# Altium PCB PlacaPotenciaMPG2.PcbDoc
Units mm, origin at the board's own origin, x right, y up, seen from the top; angles counter-clockwise.
Board outline 200 x 120 mm, 2 copper layers (Top Layer, Bottom Layer), stack 1.671 mm thick; 62 components, 49 nets, 197 pads, 110 vias.
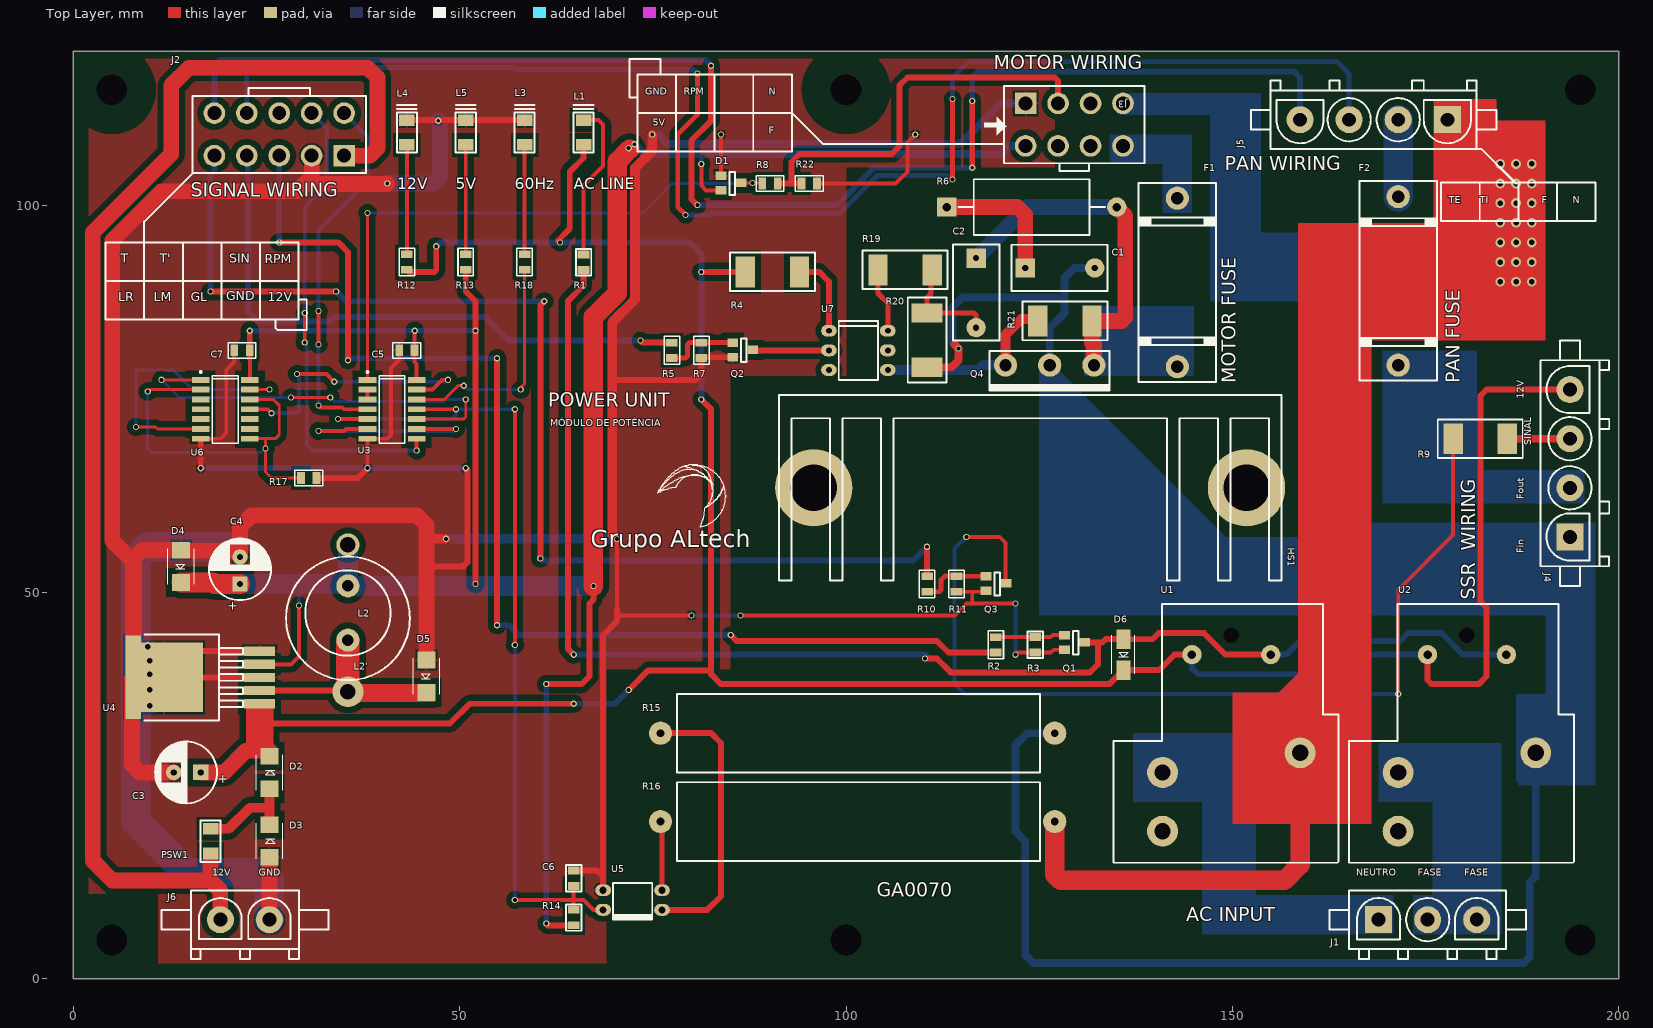
[diagram p0: Top Layer view]
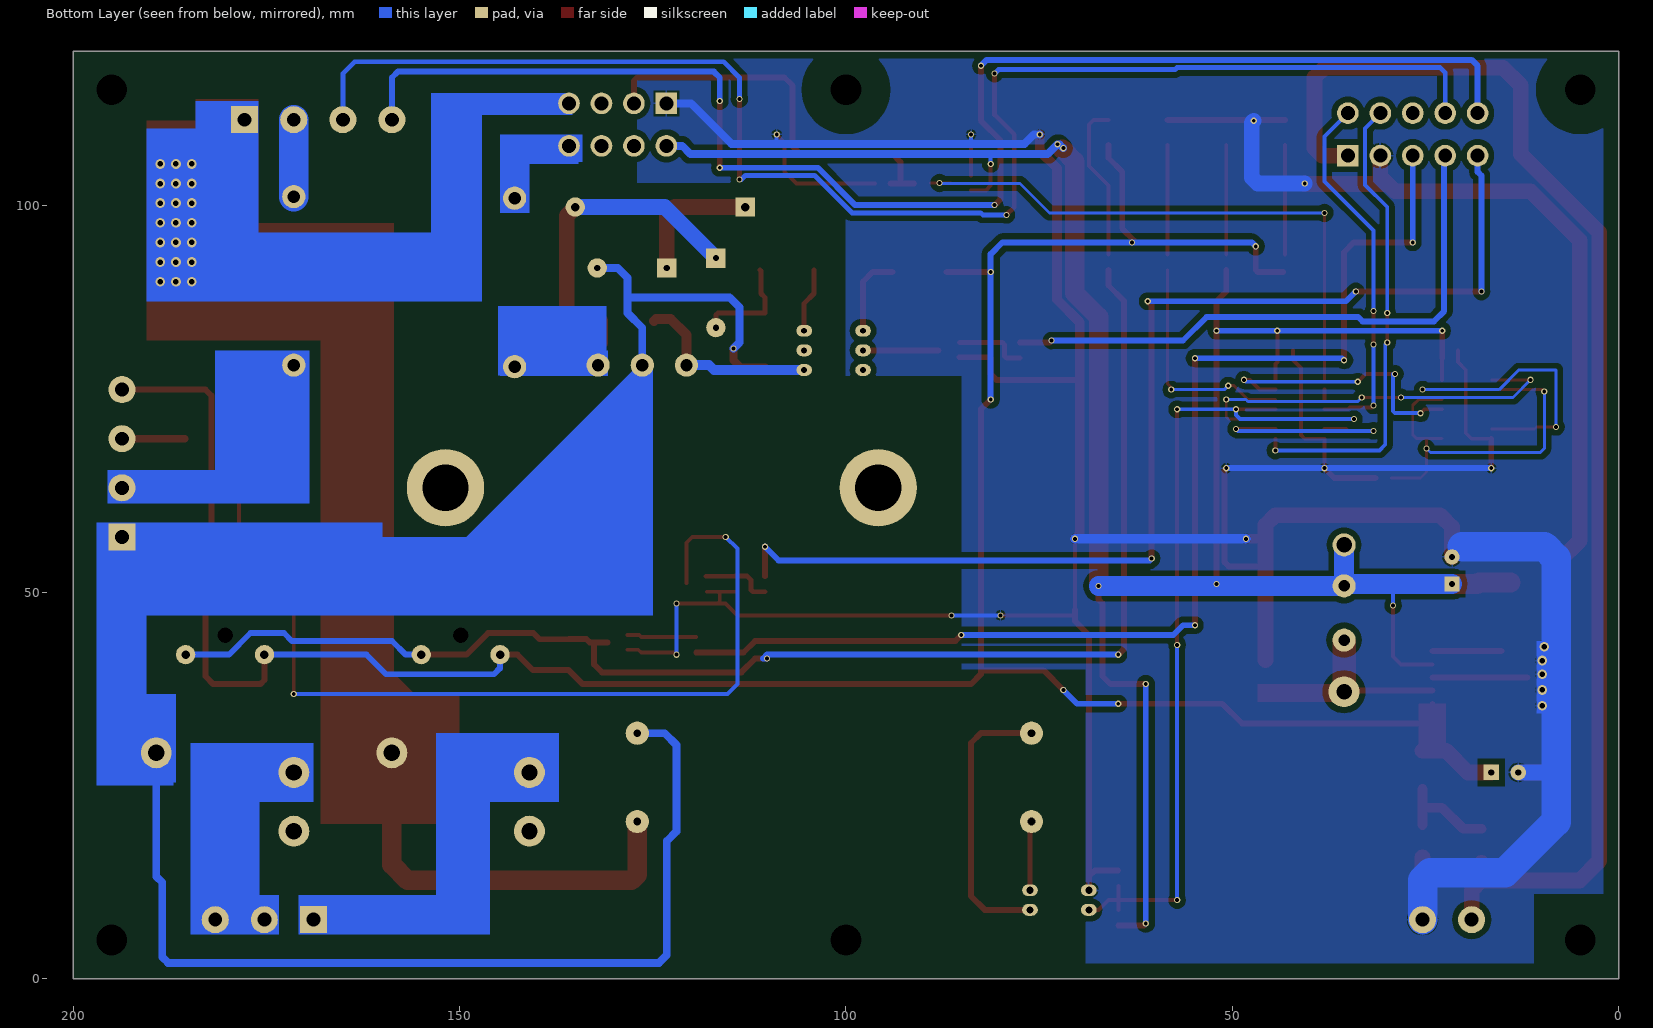
[diagram p1: Bottom Layer view, seen from below]
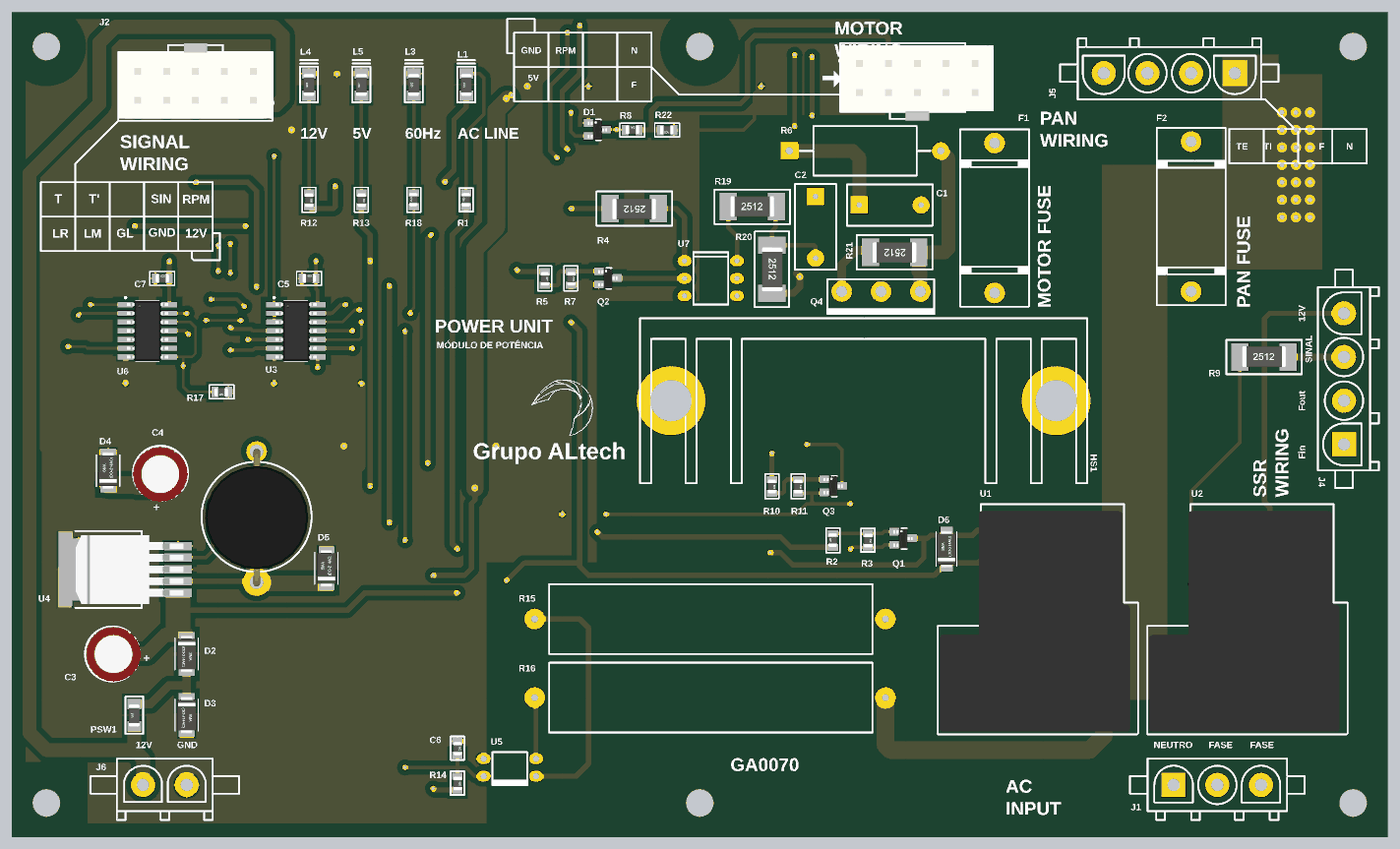
[diagram p2: 3D render of the assembled board from above, using the file's embedded part models]

## Layer stack, top to bottom
Top Solder: solder mask 0.0102, Solder Resist, Dk 3.5
Top Layer: signal copper 0.0356
Dielectric 1: dielectric 1.6, FR-4, Dk 4.8
Bottom Layer: signal copper 0.0356
Bottom Solder: solder mask 0.0102, Solder Resist, Dk 3.5

## Board outline
0,0 200,0 200,120 0,120

## Design rules (kind name [scope] priority, off if disabled: settings)
Clearance Clearance_1 [InPolygon] p1: gap=0.762
Clearance [All] p2: gap=0.305
HoleSize [All] p1: absolutevalues=TRUE maxlimit=10 minlimit=0.025 maxpercent=80.000 minpercent=20.000
PolygonConnect [All] p1: connectstyle=Relief reliefconductorwidth=0.254 reliefentries=4 polygonreliefangle="90 Angle" airgapwidth=0.254
RoutingVias [All] p1: holewidth=0.5 width=0.8 viastyle="Through Hole" minholewidth=0.5 minwidth=0.8 maxholewidth=0.5 maxwidth=0.8
SolderMaskExpansion [All] p1: expansion=0.102
UnpouredPolygon [All] p1: allowunpoured=FALSE
Width [All] p1: maxlimit=20.32 minlimit=0.254 preferedwidth=0.508
28 further rules are at their usual default settings.

## Classes and differential pairs
component class Sincronismo: C5 C6 C7 L3 R14 R15 R16 R17 R18 U5 U6
component class Regulador: C3 C4 D2 D3 D4 D5 J6 L2 L2' L4 L5 PSW1 R12 R13 U4
component class Potencia: C1 C2 D1 F1 F2 HS1 J2 J3 J4 J5 Q2 Q3 Q4 R4 R5 R6 R7 R8 R9 R10 R11 R19 R20 R21 R22 U3 U7
component class Conectores: D6 J1 L1 Q1 R1 R2 R3 U1 U2

## Components (designator, comment, footprint, x,y, rotation, side; value= is the part's Value field where it differs from the comment)
C1 "10nF/400V" "cap 330nF/250V" 123.19,91.948 r0 top
C2 "33nF/400V" "cap 330nF/250V" 116.84,93.218 r270 top
C3 "220uF/35V" "CAP POL 8x12mm" 16.51,26.67 r180 top
C4 "470uF/35V" "CAP POL 8x12mm" 21.59,51.054 r90 top
C5 "100nF/50V-0805" "0805-REVISADO ONDA"#1 43.18,81.28 r0 top
C6 "NM" "0805-REVISADO ONDA"#2 64.77,13.97 r270 top
C7 "100nF/50V-0805" "0805-REVISADO ONDA"#1 21.844,81.28 r0 top
D1 "BAT54ST" "SOT23 - REVISADO ONDA" 83.82,103.886 r270 top
D2 "1N4007-SMA" DO-214AA 25.4,26.67 r90 top
D3 "SMBJ15CA" DO-214AA 25.4,17.78 r90 top
D4 "SMBJ5.0CA" DO-214AA 13.97,53.34 r270 top
D5 "MBRS360T" DO-214AA 45.72,39.116 r270 top
D6 "1N4007" "SMA DIODES" 135.89,41.91 r270 top
F1 "ZH242" ZH242_REVISADO 142.875,100.965 r270 top
F2 "ZH242" ZH242_REVISADO 171.45,79.375 r90 top
HS1 "HS 40mm TO-220PÉ" "DISSIPADOR GRANDE" 123.825,63.5 r0 top
J1 "HYLOCK FÊMEA 3 VIAS PARA PCB" "CONECTOR HYLOCK 3 VIAS" 168.91,7.62 r0 top
J2 "MFPL-10" MFPC-10 26.67,109.22 r180 top
J3 "MFPL-08" MFPC-08 129.54,110.49 r180 top
J4 "HYLOCK 4 VIAS PCB" "CONECTOR HYLOK 4 VIAS" 193.675,57.15 r90 top
J5 "HYLOCK 4 VIAS PCB" "CONECTOR HYLOK 4 VIAS" 177.8,111.125 r180 top
J6 "HYLOCK 2 VIAS FÊMEA P/ PCB" "CONECTOR HYLOCK 2 VIAS" 19.05,7.62 r0 top
L1 "LED VERMELHO 0603 SMD" "LED 1206" 66.04,107.95 r90 top
L2 "330uH(IMAG 10x10 fio 26AWG)" "INDUTOR 47mH" 35.56,50.8 r270 top
L2' "330uH(IMAG 10x10 fio 26AWG)" "INDUTOR LOCO" 35.56,54.61 r270 top
L3 "LED VERMELHO 0603 SMD" "LED 1206" 58.42,107.95 r90 top
L4 "LED VERMELHO 0603 SMD" "LED 1206" 43.18,107.95 r90 top
L5 "LED VERMELHO 0603 SMD" "LED 1206" 50.8,107.95 r90 top
PSW1 "POLYSWITCH 1206, 1A TRIP - 0,5A HOLD" "1206-REVISADO ONDA" 17.78,17.78 r90 top
Q1 "BC846L" "SOT23 - REVISADO ONDA" 128.27,44.45 r270 top
Q2 "BC846" "SOT23 - REVISADO ONDA" 85.344,82.296 r270 top
Q3 "BC846L" "SOT23 - REVISADO ONDA" 118.11,52.07 r270 top
Q4 "BTA41-600BRG" "TO-247 - duplicate" 132.08,79.375 r180 top
R1 "22K-0805-5%" "0805-REVISADO ONDA"#2 66.04,91.694 r90 top
R2 "1K-0805-5%" "0805-REVISADO ONDA"#1 119.38,43.18 r90 top
R3 "10K-0805-5%" "0805-REVISADO ONDA"#2 124.46,44.196 r270 top
R4 "220R-2512-5%" "2512 - REVISADO ONDA" 93.98,91.44 r180 top
R5 "1K-0805-5%" "0805-REVISADO ONDA"#1 77.47,81.28 r270 top
R6 "390R-5W-5%" "RESISTOR 5W FIO" 113.03,99.822 r0 top
R7 "10K-0805-5%" "0805-REVISADO ONDA"#1 81.28,81.28 r270 top
R8 "1K-0805-5%" "0805-REVISADO ONDA"#1 90.17,102.87 r0 top
R9 "100R-2512-5%" "2512 - REVISADO ONDA" 178.562,69.85 r0 top
R10 "1K-0805-5%" "0805-REVISADO ONDA"#1 110.49,51.054 r270 top
R11 "10K-0805-5%" "0805-REVISADO ONDA"#1 114.3,51.054 r270 top
R12 "22K-0805-5%" "0805-REVISADO ONDA"#1 43.18,92.71 r270 top
R13 "22K-0805-5%" "0805-REVISADO ONDA"#1 50.8,92.71 r270 top
R14 "5K6-0805-5%" "0805-REVISADO ONDA"#2 64.77,8.89 r270 top
R15 "22K-10W-5%" "RESISTOR 10W CERAMICO" 127,31.75 r180 top
R16 "22K-10W-5%" "RESISTOR 10W CERAMICO" 127,20.32 r180 top
R17 "10K-0805-5%" "0805-REVISADO ONDA"#1 30.48,64.77 r180 top
R18 "1K-0805-5%" "0805-REVISADO ONDA"#1 58.42,92.71 r90 top
R19 "100R-2512-5%" "2512 - REVISADO ONDA" 104.14,91.694 r0 top
R20 "100R-2512-5%" "2512 - REVISADO ONDA" 110.49,86.106 r270 top
R21 "100R-2512-5%" "2512 - REVISADO ONDA" 131.826,85.09 r180 top
R22 "100K-0805-5%" "0805-REVISADO ONDA"#1 95.25,102.87 r180 top
U1 "RELÉ SLA CROMATEK" "RELE SLA CROMATEK" 149.86,44.45 r180 top
U2 "RELÉ SLA CROMATEK" "RELE SLA CROMATEK" 180.34,44.45 r180 top
U3 "74HC14D,653" "SOIC 14 PINOS" 38.1,77.47 r0 top
U4 "LM2575S-5.0" TO-263-5 24.13,35.56 r90 top
U5 "TLP620" DIP-4 76.2,8.89 r180 top
U6 "74HC393D,653" "SOIC 14 PINOS" 16.51,77.47 r0 top
U7 "MOC3020" dip6 97.79,83.82 r0 top

## Footprints (in the part's own frame and the unit in brackets; to place one, negate y for a bottom-side part, rotate by r counter-clockwise, add the part's x,y. Pads: shape width x height; smd on the part's side, far side on the other; paste and mask are expansions set on the pad)
"0805-REVISADO ONDA"#1 [mm]
  rect 1x1.5 smd: 1(-1,0) 2(1,0)
  silkscreen extent -1.8,-1 1.8,1, body extent -0.96,-0.58 1.04,0.67, height 0.78
"0805-REVISADO ONDA"#2 [mm]
  rect 1x1.5 smd: 1(0,0) 2(2,0)
  silkscreen extent -0.7,-1 2.7,1, body extent 0.04,-0.58 2.04,0.67, height 0.78
"1206-REVISADO ONDA" [mm]
  rect 1.5x2 smd: 1(-1.6,0) 2(1.6,0)
  silkscreen extent -2.7,-1.3 2.7,1.3, body extent -1.65,-0.81 1.55,0.79, height 1
"2512 - REVISADO ONDA" [mm]
  rect 2.5x4 smd: 1(0,0) 2(7,0)
  silkscreen extent -2,-2.5 9,2.5, body extent 0.33,-1.45 6.68,1.55, height 1.6
"cap 330nF/250V" [mm]
  rect 2.5x2.5 hole 0.8: 1(0,0)
  round 2.5 hole 0.8: 2(9,0)
  silkscreen extent -1.78,-3 10.67,3
"CAP POL 8x12mm" [mm]
  rect 2x2 hole 0.8: 1(0,0)
  round 2 hole 0.8: 2(3.5,0)
  silkscreen extent -2.1,-4 5.9,4, body extent -2.25,-3.97 5.75,4.03, height 12
"CONECTOR HYLOCK 2 VIAS" [mm]
  round 3.5 hole 1.8: 1(0,0) 2(6.35,0)
  silkscreen extent -7.62,-5.08 13.97,3.8
"CONECTOR HYLOCK 3 VIAS" [mm]
  rect 3.5x3.5 hole 1.8: 1(0,0)
  round 3.5 hole 1.8: 2(6.35,0) 3(12.7,0)
  silkscreen extent -6.35,-5.08 19.05,3.8
"CONECTOR HYLOK 4 VIAS" [mm]
  rect 3.5x3.5 hole 1.8: 1(0,0)
  round 3.5 hole 1.8: 2(6.35,0) 3(12.7,0) 4(19.05,0)
  silkscreen extent -6.35,-5.08 25.4,3.8
dip6 [mil] "dip6"
  oval 80x60 hole 30: 1(0,0) 2(0,-100) 3(0,-200) 4(300,-200) 5(300,-100) 6(300,0)
  silkscreen extent 50,-250 250,50
DIP-4 [mil] "DIP-4"
  oval 80x60 hole 36: 1(0,0) 2(0,-100) 3(300,-100) 4(300,0)
  silkscreen extent 50,-138 250,50
"DISSIPADOR GRANDE" [mm]
  round 10 hole 6: ""(-28,0) ""(28,0)
  silkscreen extent -32.5,-12 32.5,12
DO-214AA [mm] "SMBJ LITTELFUSE"
  rect 2.15x2.3 smd: 1(-2.1,0) 2(2.1,0)
  silkscreen extent -2.3,-1.7 2.3,1.7, body extent -2.75,-1.4 2.75,1.4, height 2.6
"INDUTOR 47mH" [mm]
  round 3 hole 1.5: 1(0,0) 2(7,0)
  silkscreen extent -2.02,-5.52 9.02,5.52
"INDUTOR LOCO" [mm]
  round 3 hole 2: 1(-1.5,0)
  round 4 hole 2: 2(17.5,0)
  silkscreen extent 0,-8 16,8, body extent -1.88,-7.47 18.12,7.53, height 13.1
"LED 1206" [mm]
  rect 1.5x2 smd: 1(-0.076,0) 2(3.124,0)
  silkscreen extent -1.08,-1.3 5.08,1.3, body extent -0.13,-0.81 3.07,0.79, height 1
MFPC-08 [mm]
  rect 2.8x2.8 hole 1.8: 1(6.3,-2.75)
  round 2.8 hole 1.8: 2(2.1,-2.75) 3(-2.1,-2.75) 4(-6.3,-2.75) 5(6.3,2.75) 6(2.1,2.75) 7(-2.1,2.75) 8(-6.3,2.75)
  silkscreen extent -9.1,-5 9.1,6, body extent -13.19,-4.72 9.41,6.28, height 12.8
MFPC-10 [mm]
  rect 2.8x2.8 hole 1.8: 1(-8.4,2.75)
  round 2.8 hole 1.8: 2(-4.2,2.75) 3(0,2.75) 4(4.2,2.75) 5(8.4,2.75) 6(-8.4,-2.75) 7(-4.2,-2.75) 8(0,-2.75) 9(4.2,-2.75) 10(8.4,-2.75)
  silkscreen extent -11.2,-6 11.2,5, body extent -11.51,-6.28 11.09,4.72, height 12.8
"RELE SLA CROMATEK" [mm]
  round 2.5 hole 1.1: 1(-5.1,2.54) 2(5.1,2.54)
  round 4 hole 2.1: 3(-8.9,15.24) 4(8.9,25.38) 5(8.9,17.78)
  round 0 hole 2: ""(0,0)
  silkscreen extent -13.86,-4 15.24,29.46, body extent -12.7,-3.02 15,29.08, height 20.1
"RESISTOR 5W FIO" [mm] "RESISTOR 5W FIO"
  rect 2.5x2.5 hole 1.1: 1(0,0)
  round 2.5 hole 1.1: 2(22,0)
  silkscreen extent 1.5,-3.6 20.5,3.6
"RESISTOR 10W CERAMICO" [mm]
  round 3 hole 1: 1(0,0) 2(51,0)
  silkscreen extent 1.9,-5.08 48.89,5.08
"SMA DIODES" [mm] "PACKAGE SMA COM DIMENSÕES DO DATASHEET DA DIODES"
  rect 2.5x1.8 smd: 1(-2,0) 2(2,0)
  silkscreen extent -2.5,-1.5 2.5,1.5, body extent -2.75,-1.4 2.75,1.4, height 2.6
"SOIC 14 PINOS" [mil] "SOIC, 14-Leads, Body 8,8x4,0mm (max), Pitch 1,27mm, IPC Medium Density"
  rect 90x30 smd: 1(0,0) 2(0,-50) 3(0,-100) 4(0,-150) 5(0,-200) 6(0,-250) 7(0,-300) 8(250,-300) 9(250,-250) 10(250,-200) 11(250,-150) 12(250,-100) 13(250,-50) 14(250,0)
  silkscreen extent -5,-323 190,45, body extent 8,-323 244,23, height 67
"SOT23 - REVISADO ONDA" [mm]
  rect 1.1x1.4 smd: 1(0,0) 2(1.9,0) 3(0.95,2.6)
  silkscreen extent -0.5,1.1 2.5,1.8, body extent -0.45,-0.1 2.45,2.7, height 1.3
"TO-247 - duplicate" [mm] "CASE 340D-01"
  round 3 hole 1.6: 1(0,0) 2(5.72,0) 3(11.44,0)
  silkscreen extent -2.02,-1.81 13.51,3.28
TO-263-5 [mm]
  rect 1.2x4 smd: 1(0,0) 2(1.7,0) 3(3.4,0) 4(5.1,0) 5(6.8,0)
  rect 9x10 smd: ""(3.4,12.328)
  rect 10.8x2 smd: ""(3.4,16.37)
  silkscreen extent -2.19,2.17 8.99,14.92, body extent -1.6,-0.79 8.4,14.88, height 4.78
ZH242_REVISADO [mm] "PORTA FUSÍVEL ZH242 REVISADO EM 2015"
  round 3 hole 1.6: 1(0,0) 2(21.8,0)
  silkscreen extent -2,-5 23.8,5

## Part data
C1 C2 C6: library part 100nF/50-0805-NPO, "100nF/50-0805-NPO"
C3: library part 2200uF/50V, "2200uF/50V"
C4: library part 470uF/50V, "470uF/50V"
C5 C7: library part 100nF/50-0805-NPO
D2: library part 1N4007, "1N4007"
D3: library part SMBJ30.0A, "SMBJ30.0A"
D4: library part SMBJ5.0A, "SMBJ5.0A"
D5: library part 1N5819-SOD80, "1N5819-SOD80"
F1 F2: library part "PORTA FUSÍVEL TIPO BERÇO", "PORTA FUSÍVEL TIPO BERÇO"
HS1: library part "DISSIPADOR 40mm PÉ"
J1: library part PCMC2-3, "PCMC2-3"
J4 J5: library part PCMC2-4, "PCMC2-4"
J6: library part PCMC2-2, "PCMC2-2"
L2 L2': library part "indutor 1mH CNF15", "1mH-CNF15-26 AWG"
PSW1: library part "POLYSWITCH 200mA", "NANOSMDC020F-2"
Q1 Q3: library part BC846
Q2: "BC846L"
R2 R5: library part 10K-0805-5%, "10K-0805-5%"
R6: library part 47R-5W-5%, "47R-5W-5%"
R9: library part 100R-0805-5%, "100R-0805-5%"
R14 R15 R16: library part 22K-0805-5%, "22K-0805-5%"
R19 R20 R21: library part 220R-2512-5%, "220R-2512-5%"
U3: library part 74HC14D, "74HC14D"
U4: library part LM2596S-ADJ, "LM2596S-ADJ"
U5: library part PC814, "PC814"
U6: library part 74HC393

## Free pads (board coordinates)
  round 0 hole 4: ""(5,5) ""(5,115) ""(100,5) ""(100,115) ""(195,5) ""(195,115)

## Via types
v1: diameter 0.8, hole 0.5, Top Layer to Bottom Layer, 84 vias
v2: diameter 1.27, hole 0.711, Top Layer to Bottom Layer, 26 vias

## Nets (pads, with @x,y where several pads share a name; then routed paths per layer and width w, separated by ;. In a path a pad name is that pad's centre, name@x,y a point inside that pad or via, vN(x,y) a via of type N, cw(c..) or ccw(c..) an arc to the next point about the centre after c; other vN are vias at no path point)
5V: C4.1 C5.2 C7.2 D1.2 D4.2 J3.5 L2'.1 L2.1 R13.2 R14.2 U3.14 U4.4 U6.14 | length 326.8
  Top Layer w0.508: U6.14 22.86,80.264 ; U4.4 28.214,40.66 29.21,41.656 v1(29.21,48.26) ; v1(44.196,83.82) 44.18,83.804 C5.2 44.18,79.772 44.45,79.502 U3.14 ; v1(81.28,105.41) 81.28,102.616 81.91,101.986 D1.2
  Top Layer w0.762: 22.86,80.264 v1(22.86,83.82) ; R13.2 50.8,88.9 52.07,87.63 v1(52.07,83.82) v1(52.07,51.054) ; v1(61.214,7.112) 61.436,6.89 R14.2 ; v1(61.214,38.1) 65.786,38.1 66.802,39.116 66.802,48.514 67.31,49.022 v1(67.31,50.8)
  Top Layer w2.54: D4.2 18.102,51.24 18.288,51.054 C4.1 ; v1(67.31,50.8) 67.31,85.598 70.409,88.697 70.409,105.715 v1@72.009,107.315
  Bottom Layer w0.508: v1(29.21,48.26) 29.21,50.8 ; v1(81.28,105.41) 81.28,106.426
  Bottom Layer w0.762: v1(22.86,83.82) v1(44.196,83.82) v1(52.07,83.82) ; v1(61.214,7.112) v1(61.214,38.1)
  Bottom Layer w1.016: v1(71.882,107.442) 72.39,107.95 v1(72.644,107.95) 73.914,106.68 120.142,106.68 121.202,107.74 J3.5
  Bottom Layer w2.54: C4.1 35.306,51.054 L2.1 ; L2'.1 L2.1 ; v1(67.31,50.8) L2.1
11V: C3.1 D2.2 D6.2 J4.4 L1.1 R4.2 R12.2 U1.2 U2.2 U4.1 | length 351.7
  Top Layer w0.762: U4.1 24.13,32.258 25.4,30.988 D2.2@25.4,29.464 ; 24.892,33.02 48.768,33.02 51.308,35.56 v1(64.77,35.56) ; R12.2@43.45,91.44 46.736,91.44 46.99,91.694 v1(46.99,94.742) ; v1(62.992,95.25) 62.738,95.504 64.262,97.028 64.262,104.394 66.04,106.172 L1.1 ; v1(71.882,37.338) 74.422,39.878 82.55,39.878 ; v1(81.28,74.93) 82.55,73.66 82.55,39.878 ; v1(81.28,91.44) R4.2 ; U1.2 142.494,41.91 140.494,39.91 D6.2 134.08,38.1 83.82,38.1 82.55,39.37 82.55,39.878 ; U2.2 175.24,38.628 175.768,38.1 181.864,38.1 182.88,39.116 182.88,48.006 182.118,48.768 182.118,75.438 182.88,76.2 J4.4
  Top Layer w2.032: C3.1 19.558,26.67 22.352,29.464 D2.2@25.4,29.464
  Bottom Layer w0.762: v1(46.99,94.742) 47.498,95.25 v1(62.992,95.25) 79.756,95.25 81.28,93.726 v1(81.28,91.44) v1(81.28,74.93) ; v1(64.77,35.56) 70.104,35.56 v1(71.882,37.338) ; U1.2 144.78,41.89 144.78,40.132 145.542,39.37 159.512,39.37 162.052,41.91 U2.2
12V: J2.1 J6.1 PSW1.1 | length 170.7
  Top Layer w2.032: 17.78,14.986 17.78,12.7 ; J6.1 19.05,11.43 17.78,12.7 ; J2.1 38.398,106.47 39.37,107.442 39.37,116.586 38.1,117.856 14.986,117.856 12.7,115.57 12.7,106.68 2.54,96.52 2.54,15.24 5.08,12.7 17.78,12.7
ENERGIZA_LINHA: J2.3 R2.1 | length 154.5
  Top Layer w0.762: v1(26.67,95.25) 34.29,95.25 35.56,93.98 v1(35.56,80.01) ; v1(54.864,45.72) v1(54.864,80.264) ; v1(85.09,44.45) 85.852,43.688 111.76,43.688 113.268,42.18 R2.1
  Bottom Layer w0.762: v1(26.67,95.25) J2.3 ; v1(35.56,80.01) 35.814,80.264 v1(54.864,80.264) ; v1(54.864,45.72) 56.388,45.72 57.658,44.45 v1(85.09,44.45)
ENTRADA_FASE: C1.2 J4.1 Q4.2 R15.1 R20.2 U2.3 | length 228.4
  Top Layer w1.016: R20.2 113.65,79.106 114.554,80.01 v1(114.554,81.534) 114.046,82.042
  Bottom Layer w1.016: v1(114.554,81.534) 113.792,82.296 113.792,86.868 115.062,88.138 128.27,88.138 ; Q4.2 126.36,84.196 128.27,86.106 128.27,88.138 ; R15.1 123.444,31.75 121.92,30.226 121.92,19.05 123.19,17.78 123.19,3.048 124.206,2.032 187.706,2.032 188.468,2.794 188.468,12.446 189.24,13.218 U2.3 ; C1.2 129.54,91.948 128.27,90.678 128.27,88.138
  Bottom Layer w2.54: 126.36,74.3 Q4.2 ; 167.005,53.975 192.405,53.975
  Bottom Layer w5.08: U2.3 189.24,31.125 193.675,35.56 193.675,55.245
ENTRADA_NEUTRO: J3.4 J5.1 R16.1 U1.3 | length 237.1
  Top Layer w2.54: R16.1 127,13.462 127.762,12.7 156.718,12.7 158.75,14.732 U1.3@158.75,29.2
  Top Layer w5.08: U1.3 165.1,35.55 165.1,74.93 163.195,76.835 163.195,88.265 165.735,90.805 179.705,90.805 180.975,92.075 180.975,110.49 180.34,111.125
  Bottom Layer w2.54: J3.4 149.015,113.24 151.765,110.49 151.765,96.52 154.305,93.98 180.34,93.98 181.61,95.25 181.61,110.49 180.975,111.125 J5.1
  other v2: 184.658,90.17 186.69,90.17 188.722,90.17 184.658,92.71 186.69,92.71 188.722,92.71 184.658,95.25 186.69,95.25 188.722,95.25 184.658,97.79 186.69,97.79 188.722,97.79 184.658,100.33 186.69,100.33 188.722,100.33 184.658,102.87 186.69,102.87 188.722,102.87 184.658,105.41 186.69,105.41 188.722,105.41
GATE_MOTOR: J2.4 R5.1 | length 77.2
  Top Layer w0.762: v1(73.406,82.55) 73.676,82.28 R5.1
  Bottom Layer w0.762: J2.4 22.606,106.334 22.606,86.36 23.946,85.02 33.153,85.02 33.731,85.598 53.34,85.598 56.388,82.55 v1(73.406,82.55)
GATE_RESISTENCIA: J2.5 R10.1 | length 149.7
  Top Layer w0.762: v1(17.78,88.9) v1(34.036,88.9) ; v1(60.452,54.356) 60.452,87.122 v1(60.96,87.63) ; R10.1 v1(110.49,55.88)
  Bottom Layer w0.762: v1(17.78,88.9) 17.78,103.886 18.27,104.376 J2.5 ; v1(34.036,88.9) 35.306,87.63 v1(60.96,87.63) ; v1(60.452,54.356) 60.706,54.102 108.712,54.102 v1(110.49,55.88)
GND: C3.2 C4.2 C5.1 C6.1 C7.1 D1.1 D3.1 D4.1 D5.1 J2.2 J3.1 J6.2 L3.2 L4.2 L5.2 Q1.2 Q2.2 Q3.2 R3.2 R7.2 R11.2 R17.1 R22.1 U3.7 U4. U4.3 U4.5 U5.3 U6.7 | length 720.9
  Top Layer w0.508: U6.7 19.05,69.85 19.812,70.612 19.812,78.74 20.828,79.756 20.828,81.264 C7.1 ; v1(38.1,66.04) U3.7 40.64,69.85 41.148,70.358 41.148,78.994 42.164,80.01 42.164,81.264 C5.1 ; 70.358,47.244 70.612,46.99 v1(80.01,46.99) ; 70.358,47.752 v1(70.358,56.896) ; D1.1 v1(83.82,109.22) ; v1(86.36,46.99) 114.046,46.99 115.57,48.514 116.586,48.514 ; R22.1 106.426,102.87 107.95,104.394 107.95,108.204 v1(108.966,109.22) ; R11.2 116.586,50.054 ; Q3.2@117.994,50.054 116.586,50.054 ; v1(121.92,41.91) 122.206,42.196 R3.2 124.492,42.164 126.492,42.164 126.878,42.55 Q1.2 ; v1(121.92,48.514) 116.586,48.514 ; 116.586,48.514 116.332,48.768 116.332,49.8 116.586,50.054
  Top Layer w0.762: U4.@11.802,38.96 U4.3 ; U4.@15.202,42.36 U4.5 ; v1(16.51,66.04) U6.7 ; R17.1 36.83,64.77 v1(38.1,66.04) ; L4.2 L5.2 L3.2 ; 45.72,53.34 50.495,53.34 51.003,53.848 51.003,65.837 v1(50.8,66.04) ; C6.1 67.818,13.97 68.58,13.208 ; U5.3 68.58,13.208 ; 69.762,77.47 80.518,77.47 81.28,78.232 R7.2 ; 70.358,47.752 70.358,47.244 70.358,46.228 68.58,44.45 68.58,13.208 ; R7.2@81.396,80.396 Q2.2
  Top Layer w1.27: 45.974,56.896 v1(48.26,56.896) ; v1(70.358,56.896) 69.762,57.492 69.762,77.47 69.762,84.924 72.683,87.845 72.683,104.863 74.93,107.111 v1(74.93,109.22)
  Top Layer w2.032: C3.2 8.636,26.67 7.62,27.686 7.62,38.82 U4.@7.76,38.96 ; J6.2 D3.1 ; J2.2 30.87,103.768 29.913,102.811 ; v1(40.64,102.87) 40.581,102.811 29.913,102.811 ; D5.1 45.72,53.34 45.72,58.674 44.45,59.944 23.114,59.944 21.59,58.42 C4.2 20.772,55.372 14.038,55.372 D4.1 8.958,55.44 7.874,54.356 7.874,39.074 U4.@7.76,38.96 ; U4.@7.76,38.96 7.76,53.962 5.08,56.642 5.08,95.504 11.43,101.854 28.956,101.854 29.913,102.811
  Bottom Layer w0.508: v1(80.01,46.99) v1(86.36,46.99) ; 83.82,108.001 v1(83.82,109.22) ; 108.966,108.001 v1(108.966,109.22) ; v1(121.92,41.91) v1(121.92,48.514)
  Bottom Layer w0.762: v1(16.51,66.04) v1(38.1,66.04) v1(50.8,66.04)
  Bottom Layer w1.016: v1(74.93,109.22) 75.692,109.22 76.911,108.001 83.82,108.001 108.966,108.001 114.808,108.001 120.047,113.24 J3.1
  Bottom Layer w1.27: v1(48.26,56.896) v1(70.358,56.896)
  Bottom Layer w2.032: 8.382,26.67 C3.2 ; v1(40.64,102.87) 46.736,102.87 47.498,103.632 47.498,110.744 v1(47.244,110.998)
  Bottom Layer w3.81: 20.264,55.88 9.652,55.88 8.128,54.356 8.128,20.32 14.732,13.716 24.384,13.716 25.4,12.7 J6.2
  other v2: 9.906,35.306 9.906,37.338 9.906,39.37 9.906,41.148 9.652,42.926
NetC1_1: C1.1 R6.1 | length 17.4
  Top Layer w2.032: R6.1 122.174,99.822 123.19,98.806 C1.1
NetC2_1: C2.1 F1.2 Q4.1 R6.2 R21.1 | length 56.5
  Top Layer w2.032: Q4.1 132.08,82.042 131.826,82.296 R21.1 135.636,85.09 136.144,85.598 136.144,98.708 R6.2
  Bottom Layer w2.032: C2.1 123.444,99.822 R6.2 ; Q4.1 F1.2@142.665,79.375
NetC2_2: C2.2 R19.2 R20.1 | length 13.9
  Top Layer w0.635: R19.2 110.998,91.552 110.998,88.646 110.49,88.138 R20.1 116.586,86.106 116.84,85.852 C2.2
NetC6_2: C6.2 R14.1 U3.5 U3.11 U5.4 | length 111.3
  Top Layer w0.508: v1(34.29,72.39) U3.5 ; U3.11 v1(49.53,73.66) ; v1(57.15,10.16) 64.77,10.16 ; v1(57.15,43.18) v1(57.15,73.66) ; R14.1 64.77,10.16 ; C6.2 64.77,10.16 ; U5.4 67.31,8.89 66.04,10.16 64.77,10.16
  Bottom Layer w0.508: v1(34.29,72.39) 49.022,72.39 49.53,72.898 v1(49.53,73.66) v1(57.15,73.66) ; v1(57.15,10.16) v1(57.15,43.18)
NetD1_3: D1.3 R8.1 U3.1 | length 75.7
  Top Layer w0.381: U3.1 v1(38.1,99.06) ; D1.3 v1(87.884,102.936) R8.1@89.104,102.936
  Bottom Layer w0.381: v1(38.1,99.06) 73.66,99.06 77.47,102.87 87.884,102.87 v1(87.884,102.936)
NetD2_1: D2.1 D3.2 PSW1.2 | length 13.4
  Top Layer w1.27: PSW1.2 20.142,19.38 22.86,22.098 25.4,22.098 ; D3.2 25.4,22.098 ; D2.1 25.4,22.098
NetD5_2: D5.2 L2'.2 L2.2 U4.2 | length 28.4
  Top Layer w0.762: U4.2 34.114,37.26 34.29,37.084 35.534,37.084 L2'.2 L2.2
  Top Layer w1.524: L2'.2@35.534,37.084 37.338,37.084 37.406,37.016 D5.2
NetD6_1: D6.1 Q1.3 R1.1 U1.1 U2.1 | length 182.3
  Top Layer w0.762: v1(64.77,41.91) 64.008,42.672 64.008,87.63 66.04,89.662 R1.1 ; v1(110.236,41.402) 111.76,41.402 113.538,39.624 131.572,39.624 132.588,40.64 132.588,43.246 ; Q1.3 133.162,43.5 133.604,43.942 135.858,43.942 D6.1 139.668,43.91 140.462,44.704 146.304,44.704 149.098,41.91 U1.1
  Bottom Layer w0.762: v1(64.77,41.91) 110.236,41.91 110.744,41.402 v1(110.236,41.402) ; U1.1 156.972,41.91 158.75,43.688 171.704,43.688 172.72,44.704 177.038,44.704 179.832,41.91 U2.1
NetF1_1: F1.1 J3.8 | length 12.8
  Bottom Layer w2.54: J3.8 141.18,107.74 142.875,106.045 F1.1
NetF2_1: F2.1 J4.2 | length 37
  Bottom Layer w3.81: F2.1 171.45,65.405 173.355,63.5 J4.2
NetF2_2: F2.2 J5.2 | length 10
  Bottom Layer w3.81: F2.2 J5.2
NetJ1_1: J1.1 U1.5 | length 43.7
  Bottom Layer w3.81: U1.5 146.685,26.67 149.225,24.13 149.225,10.795 152.4,7.62 J1.1
NetJ1_2: J1.2 J1.3 U2.5 | length 33
  Bottom Layer w2.54: J1.2 J1.3
  Bottom Layer w3.81: U2.5 177.165,26.67 181.61,22.225 J1.3
NetJ3_2: J3.2 R8.2 R22.2 | length 52.6
  Top Layer w0.762: R8.2 92.964,102.87 ; R22.2 92.964,102.87 ; J3.2 127.44,116.146 127,116.586 107.95,116.586 106.934,115.57 106.934,107.696 105.918,106.68 93.98,106.68 92.964,105.664 92.964,102.87
NetJ4_3: J4.3 R9.2 | length 8.1
  Top Layer w1.016: R9.2 J4.3
NetL1_2: L1.2 R1.2 | length 20.6
  Top Layer w0.508: R1.2 66.04,102.616 68.58,105.156 68.58,110.49 67.996,111.074 L1.2
NetL3_1: L3.1 R18.2 | length 14.2
  Top Layer w0.508: R18.2 L3.1
NetL4_1: L4.1 R12.1 | length 14.2
  Top Layer w0.508: R12.1 L4.1
NetL5_1: L5.1 R13.1 | length 14.2
  Top Layer w0.508: R13.1 L5.1
NetQ1_1: Q1.1 R2.2 R3.1 | length 9
  Top Layer w0.508: R2.2 126.476,44.18 126.746,44.45 Q1.1
NetQ2_1: Q2.1 R5.2 R7.1 | length 9.6
  Top Layer w0.635: R5.2 79.264,80.28 79.502,80.518 79.502,82.042 79.756,82.296 81.264,82.296 R7.1 ; R7.1@81.296,82.296 Q2.1
NetQ2_3: Q2.3 U7.2 | length 9.8
  Top Layer w0.762: Q2.3@88.01,81.28 U7.2
NetQ3_1: Q3.1 R10.2 R11.1 | length 9.2
  Top Layer w0.635: R10.2 112.03,50.054 112.268,50.292 112.268,51.562 112.776,52.07 114.284,52.07 R11.1 Q3.1@118.094,52.054
NetQ3_3: Q3.3 R9.1 | length 124.2
  Top Layer w0.508: v1(115.57,57.15) 119.888,57.15 120.65,56.388 Q3.3@120.65,51.18 ; v1(171.45,36.83) 171.45,50.292 178.562,57.404 R9.1
  Bottom Layer w0.508: v1(115.57,57.15) 114.046,55.626 114.046,38.1 115.316,36.83 v1(171.45,36.83)
NetQ4_3: Q4.3 R21.2 U7.4 | length 24.6
  Top Layer w1.27: Q4.3 120.64,83.302 122.682,85.344 124.572,85.344 R21.2
  Bottom Layer w1.27: U7.4 117.094,78.74 117.729,79.375 Q4.3
NetR4_1: R4.1 U7.1 | length 10.7
  Top Layer w0.762: R4.1 96.52,91.44 97.79,90.17 U7.1
NetR15_2: R15.2 U5.1 | length 36.5
  Top Layer w0.762: R15.2 82.55,31.75 83.82,30.48 83.82,10.668 82.042,8.89 U5.1
NetR16_2: R16.2 U5.2 | length 8.7
  Top Layer w0.635: U5.2 R16.2@76.2,20.12
NetR17_2: R17.2 U6.2 U6.8 U6.12 | length 51.2
  Top Layer w0.381: v1(9.652,75.946) 9.906,76.2 U6.2 ; U6.8 24.892,69.85 ; U6.12 25.908,74.93 26.67,74.168 26.67,70.358 26.162,69.85 24.892,69.85 ; R17.2 25.654,64.77 24.892,65.532 v1(24.892,68.58) 24.892,69.85
  Bottom Layer w0.381: v1(9.652,75.946) 9.652,68.58 10.16,68.072 24.384,68.072 v1(24.892,68.58)
NetR18_1: R18.1 U3.12 | length 30.5
  Top Layer w0.381: U3.12 48.006,74.93 49.784,76.708 v1(50.546,76.708) ; v1(57.912,76.2) 57.658,76.2 58.42,76.962 R18.1
  Bottom Layer w0.381: v1(50.546,76.708) 51.054,76.2 v1(57.912,76.2)
NetR19_1: R19.1 U7.6 | length 8.4
  Top Layer w0.635: R19.1 104.14,88.646 105.41,87.376 U7.6
NetU3_2: U3.2 U3.3 | length 1.3
  Top Layer w0.508: U3.3 U3.2
NetU3_6: U3.6 U3.9 | length 29.4
  Top Layer w0.508: v1(31.75,70.866) 35.052,70.866 35.306,71.12 U3.6 ; U3.9 v1(49.53,71.12)
  Bottom Layer w0.508: v1(31.75,70.866) 49.276,70.866 v1(49.53,71.12)
NetU3_10: U3.10 U6.1 | length 54.5
  Top Layer w0.381: v1(11.43,77.47) U6.1 ; v1(28.194,75.184) v1(33.274,75.184) ; U3.10 50.546,72.39 50.8,72.644 v1(50.8,74.93)
  Bottom Layer w0.381: v1(11.43,77.47) 13.716,75.184 v1(28.194,75.184) ; v1(33.274,75.184) 33.782,74.676 48.006,74.676 48.26,74.93 v1(50.8,74.93)
NetU3_13: U3.13 U6.11 | length 36.4
  Top Layer w0.508: U6.11 25.146,73.66 v1(25.654,73.152) ; v1(28.956,78.232) 32.766,78.232 v1(33.782,77.216) ; U3.13 46.482,76.2 47.752,77.47 v1(48.514,77.47)
  Bottom Layer w0.508: v1(25.654,73.152) 28.956,73.152 29.21,73.406 29.21,78.232 v1(28.956,78.232) ; v1(33.782,77.216) 48.26,77.216 v1(48.514,77.47)
NetU6_6: U6.6 U6.13 | length 36.7
  Top Layer w0.381: v1(8.128,71.374) 10.668,71.374 10.922,71.12 U6.6 ; U6.13 v1(25.4,76.2)
  Bottom Layer w0.381: v1(8.128,71.374) 8.128,78.74 12.954,78.74 15.494,76.2 v1(25.4,76.2)
RPM: J2.6 U3.4 | length 48.2
  Top Layer w0.508: v1(31.75,74.168) 32.004,73.914 34.798,73.914 35.052,73.66 U3.4 ; v1(31.75,82.042) v1(31.75,86.36)
  Bottom Layer w0.508: v1(31.75,74.168) v1(31.75,82.042) ; v1(31.75,86.36) 31.75,96.774 38.1,103.124 38.1,108.94 J2.6
SINCRONISMO: J2.7 U3.8 | length 61
  Top Layer w0.508: v1(29.972,82.296) v1(29.972,86.106) ; v1(44.45,68.326) U3.8
  Bottom Layer w0.508: v1(29.972,82.296) 30.226,82.042 30.226,69.088 30.988,68.326 v1(44.45,68.326) ; v1(29.972,86.106) 29.972,99.822 32.829,102.679 32.829,110.011 J2.7
TEMP: J2.9 J5.3 | length 192.7
  Top Layer w0.635: v1(79.248,98.806) 78.232,99.822 78.232,109.22 80.772,111.76 v1(80.772,117.094) ; v1(113.792,103.378) v1(113.792,113.792)
  Bottom Layer w0.635: J2.9 22.47,117.212 23.114,117.856 57.15,117.856 57.404,117.602 80.264,117.602 v1(80.772,117.094) ; v1(79.248,98.806) 82.296,98.806 82.563,99.073 99.222,99.073 104.048,103.899 113.017,103.899 113.538,103.378 v1(113.792,103.378) ; v1(113.792,113.792) 113.792,116.586 115.824,118.618 163.576,118.618 165.1,117.094 J5.3
TEMP': J2.10 J5.4 | length 188.2
  Top Layer w0.762: v1(80.772,100.076) 80.01,100.838 80.01,108.458 82.55,110.998 v1(82.55,118.11) ; v1(116.332,104.902) v1(116.332,113.538)
  Bottom Layer w0.762: J2.10 18.27,118.092 19.05,118.872 81.788,118.872 v1(82.55,118.11) ; v1(80.772,100.076) 98.806,100.076 103.632,104.902 v1(116.332,104.902) ; v1(116.332,113.538) 116.332,116.586 117.094,117.348 157.988,117.348 158.75,116.586 J5.4
pads on no net: HS1. J2.8 J3.3 J3.6 J3.7 U1. U1.4 U2. U2.4 U6.3 U6.4 U6.5 U6.9 U6.10 U7.3 U7.5

## Polygon pours and split planes (outlines as drawn)
GND on Top Layer "Bottom Layer-No Net" (solid, pour order 4): 2,11 10,11 11,11 11,2 69,2 69,14 69,40 85,40 85,78 100,78 100,105 127,105 127,118 126,119 3,119 2,119
GND on Bottom Layer "Bottom Layer-No Net" (solid, pour order 6): 2,11 11,11 11,2 69,2 69,40 85,40 85,78 100,78 100,103 127,103 127,119 88,119 2,119

## Other copper
Top Layer:
  rectangle net ENTRADA_NEUTRO: 163.93,26 168,89
  rectangle net ENTRADA_NEUTRO: 150,20 168,26
  rectangle net ENTRADA_NEUTRO: 150,20 159,37
  rectangle net ENTRADA_NEUTRO: 154.94,25.4 167.64,36.83
  rectangle net ENTRADA_NEUTRO: 161.29,25.4 167.64,93.98
  rectangle net ENTRADA_NEUTRO: 161.29,86.614 185.42,93.98
  rectangle net ENTRADA_NEUTRO: 178.562,86.614 185.42,108.712
  rectangle net ENTRADA_NEUTRO: 176.022,108.458 184.15,113.792
  rectangle net ENTRADA_NEUTRO: 158.496,35.56 161.29,93.98
  rectangle net ENTRADA_NEUTRO: 165.354,82.55 185.42,86.614
  rectangle net ENTRADA_NEUTRO: 158.496,93.98 179.324,97.79
  rectangle net ENTRADA_NEUTRO: 176.022,93.218 182.372,108.712
  rectangle net ENTRADA_NEUTRO: 184.15,82.55 190.5,110.998
  rectangle net 11V: 22.352,28.702 25.908,35.56
  rectangle net NetD5_2: 34.036,35.814 37.084,43.942
  rectangle net NetD5_2: 37.084,35.814 46.736,38.1
  region net ENTRADA_NEUTRO: 159,40 155,36 155,35 161,35
Bottom Layer:
  rectangle net ENTRADA_FASE: 160,55 187,59
  rectangle net ENTRADA_FASE: 187,25 191,27
  rectangle net ENTRADA_FASE: 191,25 197,53
  rectangle net ENTRADA_FASE: 187,53 197,59
  rectangle net NetJ1_1: 138.43,23.495 152.4,29.21
  rectangle net NetJ1_1: 137.16,23.495 152.4,31.75
  rectangle net NetJ1_1: 137.16,22.86 153.035,31.75
  rectangle net NetJ1_1: 146.05,5.715 153.035,22.86
  rectangle net NetJ1_1: 146.05,5.715 170.815,10.795
  rectangle net NetJ1_2: 168.91,24.13 184.785,30.48
  rectangle net NetJ1_2: 179.705,5.715 184.785,27.305
  rectangle net NetJ1_2: 173.355,5.715 179.705,10.795
  rectangle net NetJ1_2: 175.895,9.525 182.245,25.4
  rectangle net NetJ1_2: 168.91,22.86 177.165,24.13
  rectangle net ENTRADA_FASE: 190.5,25.4 196.85,57.785
  rectangle net ENTRADA_FASE: 186.69,25.4 196.85,35.56
  rectangle net ENTRADA_FASE: 186.69,35.56 191.135,36.83
  rectangle net ENTRADA_FASE: 125.73,46.99 191.135,57.15
  rectangle net ENTRADA_FASE: 124.968,46.99 127.508,79.502
  rectangle net NetF2_1: 169.418,61.468 195.58,65.786
  rectangle net NetF2_1: 169.418,65.786 173.482,81.28
  rectangle net ENTRADA_NEUTRO: 176.022,108.458 184.15,113.538
  rectangle net ENTRADA_NEUTRO: 178.816,87.63 184.15,108.458
  rectangle net ENTRADA_NEUTRO: 147.066,87.63 178.816,96.52
  rectangle net ENTRADA_NEUTRO: 147.066,96.52 153.67,114.554
  rectangle net ENTRADA_NEUTRO: 135.382,111.76 153.67,114.554
  rectangle net NetF1_1: 134.62,105.41 144.78,109.22
  rectangle net NetF1_1: 140.97,99.06 144.78,105.41
  rectangle net NetF1_1: 134.112,105.664 135.636,109.22
  rectangle net NetC2_1: 130.81,77.978 144.78,81.28
  rectangle net NetF2_1: 173.482,64.262 181.61,81.28
  rectangle net ENTRADA_NEUTRO: 176.022,87.63 190.5,109.982
  rectangle net GND: 8.636,34.29 10.668,43.688
  rectangle net NetC2_1: 131,78 145,87
  region net ENTRADA_FASE: 127.508,78.74 149.606,56.642 126.492,56.642

## Silkscreen, mask and mechanical layers (free items; w line width, h text height)
Top Overlay:
  drawing of 542 lines, arcs and shapes, not listed
  text "MOTOR WIRING" at 119.126,117.094 h3.05
  text "GND" at 74,114 h1.52
  text "RPM" at 79,114 h1.52
  text "N" at 90,114 h1.52
  text "5V" at 75,110 h1.52
  text "F" at 90,109 h1.52
  text "PAN WIRING" at 149,104 h3.05
  text "12V" at 41.91,101.6 h2.54
  text "5V" at 49.53,101.6 h2.54
  text "60Hz" at 57.15,101.6 h2.54
  text "AC LINE" at 64.77,101.6 h2.54
  text "SIGNAL WIRING" at 15.24,100.584 h3.05
  text "TE" at 178,100 h1.52
  text "TI" at 182,100 h1.52
  text "F" at 190,100 h1.52
  text "N" at 194,100 h1.52
  text "T" at 6.191,92.25 h2.03
  text "T'" at 11.191,92.25 h2.03
  text "SIN" at 20.191,92.25 h2.03
  text "RPM" at 24.768,92.187 h2.03
  text "GND" at 19.815,87.361 h2.03
  text "GL" at 15.191,87.25 h2.03
  text "12V" at 25.191,87.25 h2.03
  text "LR" at 5.845,87.234 h2.03
  text "LM" at 10.417,87.234 h2.03
  text "MOTOR FUSE" at 151,77 h3.05 r90
  text "PAN FUSE" at 180,77 h3.05 r90
  text "12V" at 188,75 h1.52 r90
  text "POWER UNIT" at 61.468,73.406 h3.05
  text "MÓDULO DE POTÊNCIA" at 61.722,71.12 h1.52
  text "SINAL" at 189,69 h1.52 r90
  text "Fout" at 188,62 h1.52 r90
  text "Grupo ALtech" at 67,55 h3.81
  text "Fin" at 188,55 h1.52 r90
  text "SSR  WIRING" at 182,49 h3.05 r90
  text "12V" at 18,13 h1.52
  text "GND" at 24,13 h1.52
  text "NEUTRO" at 166,13 h1.52
  text "FASE" at 174,13 h1.52
  text "FASE" at 180,13 h1.52
  text "GA0070" at 104,10 h3.05
  text "AC INPUT" at 144.018,6.858 h3.05
Mechanical 1:
  lines w0.254: 198,125 200,125 200,120 ; 199,125 0,125 0,120 ; 0,0 0,-5 200,-5 200,0 ; 0,0 0,120 ; 0,0 200,0 ; 0,120 200,120 ; 200,0 200,120
  text "BORDA PARA FIXAÇÃO AO PALLET DE MONTAGEM" at 67,122 h3
  text "BORDA PARA FIXAÇÃO AO PALLET DE MONTAGEM" at 63,-3 h3
  text "- PRODUZIR EM 2 Oz/Ft²" at 1.651,-13.081 h4
  text "- Mascara de solda a cor vermelha" at 1.651,-18.542 h4
Drill Drawing:
  circle w0.085: c214.365,64.588 r0.635
  lines w0.085: 213.73,68.08 214.048,68.08 214.365,67.763 214.683,68.08 215,68.08 214.683,68.398 215,68.715 214.683,68.715 214.365,69.033 214.048,68.715 213.73,68.715 214.048,68.398 213.73,68.08 ; 213.73,71.573 215,71.573 215,72.843 213.73,72.843 213.73,71.573 ; 213.73,75.7 214.048,75.7 214.365,75.383 214.683,75.7 215,75.7 214.683,76.018 215,76.335 214.683,76.335 214.365,76.653 214.048,76.335 213.73,76.335 214.048,76.018 213.73,75.7 ; 213.73,80.463 215,80.463 214.365,79.193 213.73,80.463 ; 213.73,91.258 214.365,90.623 215,91.258 214.365,91.893 213.73,91.258 ; 213.73,95.703 215,95.703 214.365,94.433 213.73,95.703 ; 213.73,98.243 214.365,98.56 215,98.243 214.683,98.878 215,99.513 214.365,99.195 213.73,99.513 214.048,98.878 213.73,98.243 ; 213.73,102.053 213.73,102.37 214.048,102.688 213.73,103.005 213.73,103.323 214.048,103.323 214.365,103.005 214.683,103.323 215,103.323 215,103.005 214.683,102.688 215,102.37 215,102.053 214.683,102.053 214.365,102.37 214.048,102.053 213.73,102.053 ; 213.73,106.18 214.048,106.18 214.048,105.863 214.683,105.863 214.683,106.18 215,106.18 215,106.815 214.683,106.815 214.683,107.133 214.048,107.133 214.048,106.815 213.73,106.815 213.73,106.18 ; 213.73,113.483 214.365,113.8 215,113.483 214.683,114.118 215,114.753 214.365,114.435 213.73,114.753 214.048,114.118 213.73,113.483 ; 213.984,68.207 214.175,68.207 214.365,68.017 214.556,68.207 214.746,68.207 214.556,68.398 214.746,68.588 214.556,68.588 214.365,68.779 214.175,68.588 213.984,68.588 214.175,68.398 213.984,68.207 ; 213.984,80.209 214.746,80.209 214.365,79.447 213.984,80.209 ; 213.984,98.497 214.365,98.687 214.746,98.497 214.556,98.878 214.746,99.259 214.365,99.068 213.984,99.259 214.175,98.878 213.984,98.497
  lines w0.381: 212,62.81 310.526,62.81 ; 212,116.15 310.526,116.15 ; 225.992,59 225.992,119.96 ; 243.717,59 243.717,119.96 ; 277.895,59 277.895,119.96 ; 290.744,59 290.744,119.96 ; 212,59 310.526,59 310.526,119.96 212,119.96 212,59
  text "Symbol" at 214.286,117.293 h1.83
  text "Hit Count" at 227.135,117.293 h1.83
  text "Finished Hole Size" at 244.86,117.293 h1.83
  text "Plated" at 279.038,117.293 h1.83
  text "Hole Type" at 291.887,117.293 h1.83
  text "2" at 227.135,113.483 h1.52
  text "1,500mm (59,06mil)" at 244.86,113.483 h1.52
  text "PTH" at 279.038,113.483 h1.52
  text "Round" at 291.887,113.483 h1.52
  text "E" at 214.048,109.99 h1.27
  text "2" at 227.135,109.673 h1.52
  text "6,000mm (236,22mil)" at 244.86,109.673 h1.52
  text "PTH" at 279.038,109.673 h1.52
  text "Round" at 291.887,109.673 h1.52
  text "4" at 227.135,105.863 h1.52
  text "0,914mm (36,00mil)" at 244.86,105.863 h1.52
  text "PTH" at 279.038,105.863 h1.52
  text "Round" at 291.887,105.863 h1.52
  text "4" at 227.135,102.053 h1.52
  text "1,000mm (39,37mil)" at 244.86,102.053 h1.52
  text "PTH" at 279.038,102.053 h1.52
  text "Round" at 291.887,102.053 h1.52
  text "4" at 227.135,98.243 h1.52
  text "2,000mm (78,74mil)" at 244.86,98.243 h1.52
  text "PTH" at 279.038,98.243 h1.52
  text "Round" at 291.887,98.243 h1.52
  text "6" at 227.135,94.433 h1.52
  text "0,762mm (30,00mil)" at 244.86,94.433 h1.52
  text "PTH" at 279.038,94.433 h1.52
  text "Round" at 291.887,94.433 h1.52
  text "6" at 227.135,90.623 h1.52
  text "1,100mm (43,31mil)" at 244.86,90.623 h1.52
  text "PTH" at 279.038,90.623 h1.52
  text "Round" at 291.887,90.623 h1.52
  text "B" at 214.048,87.13 h1.27
  text "6" at 227.135,86.813 h1.52
  text "2,100mm (82,68mil)" at 244.86,86.813 h1.52
  text "PTH" at 279.038,86.813 h1.52
  text "Round" at 291.887,86.813 h1.52
  text "C" at 214.048,83.32 h1.27
  text "6" at 227.135,83.003 h1.52
  text "4,000mm (157,48mil)" at 244.86,83.003 h1.52
  text "PTH" at 279.038,83.003 h1.52
  text "Round" at 291.887,83.003 h1.52
  text "7" at 227.135,79.193 h1.52
  text "1,600mm (62,99mil)" at 244.86,79.193 h1.52
  text "PTH" at 279.038,79.193 h1.52
  text "Round" at 291.887,79.193 h1.52
  text "8" at 227.135,75.383 h1.52
  text "0,800mm (31,50mil)" at 244.86,75.383 h1.52
  text "PTH" at 279.038,75.383 h1.52
  text "Round" at 291.887,75.383 h1.52
  text "26" at 227.135,71.573 h1.52
  text "0,711mm (28,00mil)" at 244.86,71.573 h1.52
  text "PTH" at 279.038,71.573 h1.52
  text "Round" at 291.887,71.573 h1.52
  text "31" at 227.135,67.763 h1.52
  text "1,800mm (70,87mil)" at 244.86,67.763 h1.52
  text "PTH" at 279.038,67.763 h1.52
  text "Round" at 291.887,67.763 h1.52
  text "84" at 227.135,63.953 h1.52
  text "0,500mm (19,69mil)" at 244.86,63.953 h1.52
  text "PTH" at 279.038,63.953 h1.52
  text "Round" at 291.887,63.953 h1.52
  text "196 Total" at 227.135,60.143 h1.52

## Text inside footprints (layer, text, board x,y; h text height)
C3: Top Overlay "+" at 20.066,26.67 h2 r180
C4: Top Overlay "+" at 21.59,47.498 h2 r90